# EAGLE board ModuleCarrier-NINA-B1-v1.0.0 (EAGLE 7.7.0)
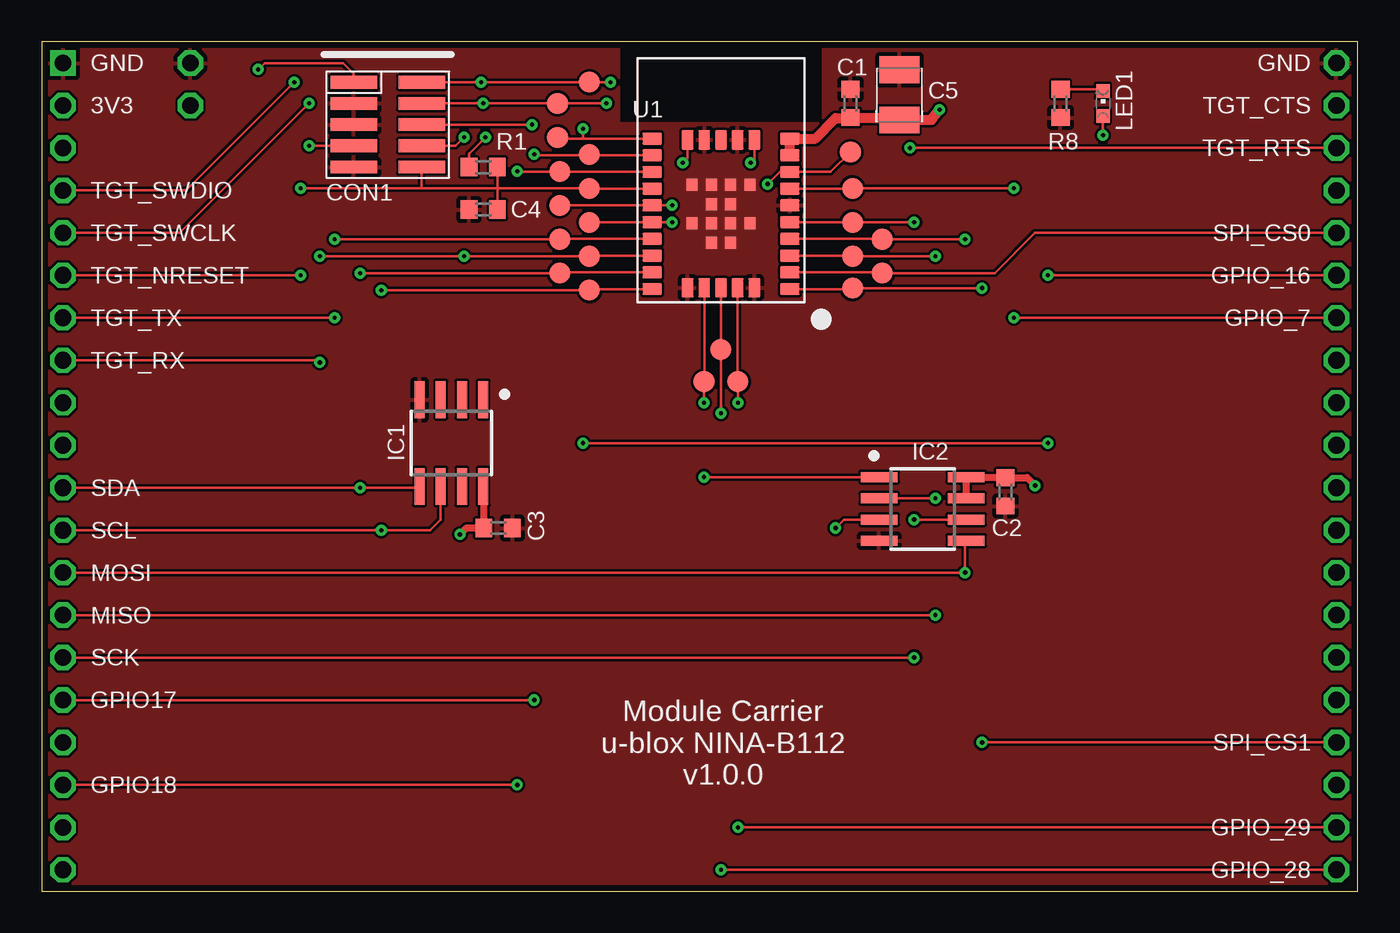
[diagram p0: board, top side]
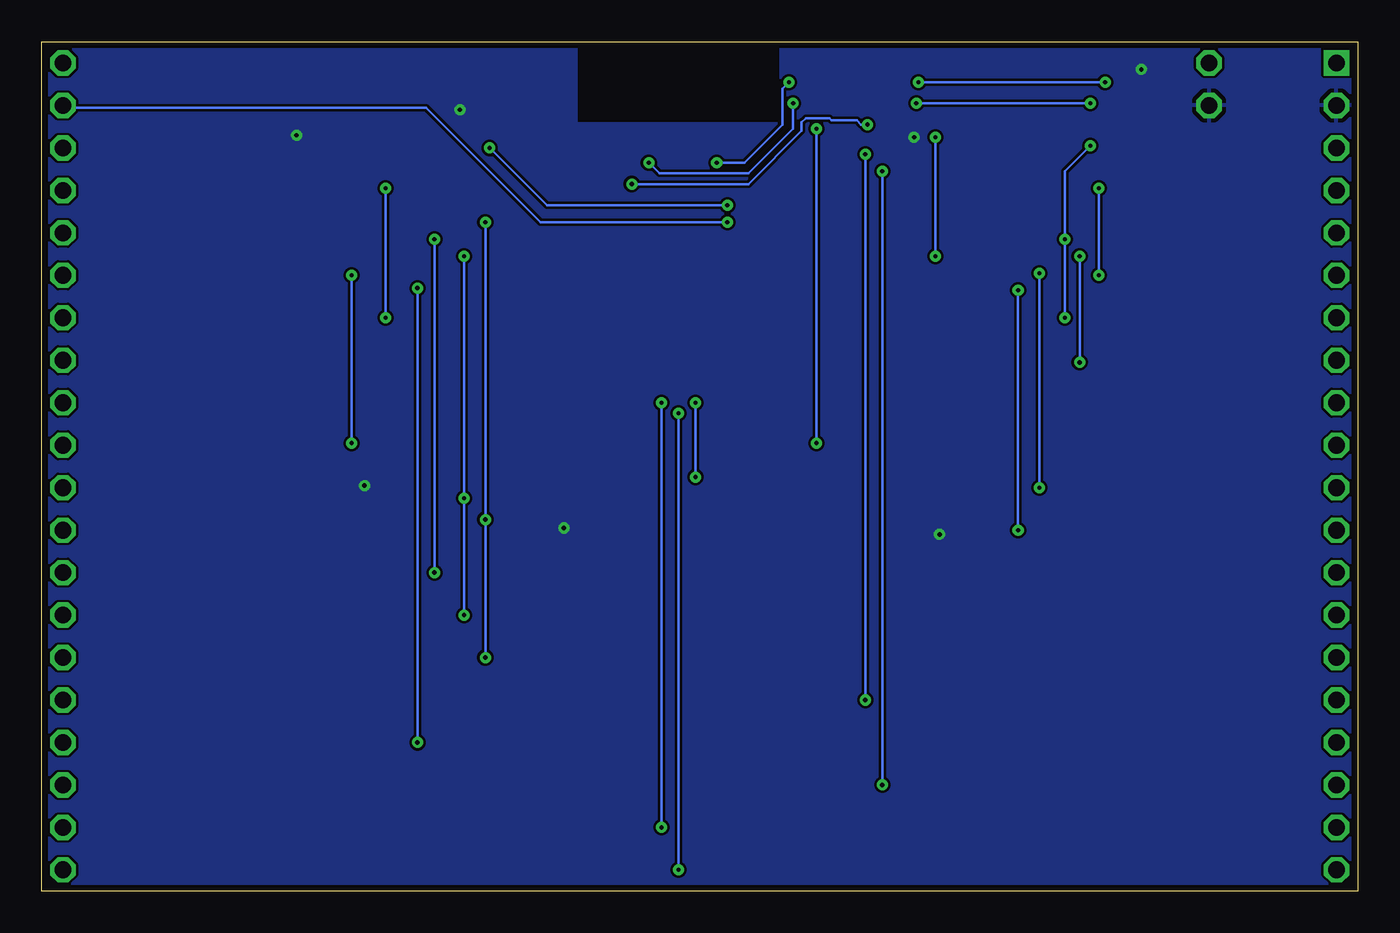
[diagram p1: board, bottom side, seen from below]

Size 78.74 x 50.8 mm. Coordinates in mm from the lower left corner, seen from the top.
Copper layers ((1*16)): Top 0.035mm / dielectric 0.8mm / Bottom 0.035mm
Design rules "mbed-HDK-6-6-2-layer": minimum track width 6mil, minimum drill 9mil, track to track 6mil, track to pad 6mil, pad to pad 6mil, via to via 6mil, smd to smd 6mil, copper to edge 15mil, drill to drill 8mil, minimum pad ring 10mil, minimum via ring 8mil, stop-mask expansion 4mil, vias tented up to drill 0mil, thermal gap 10mil

## Footprints (pad centres in the part's own frame; a part is rotated, then mirrored left to right if it is on the bottom)
0603 = smd 1 x 1.1: 1 -0.85,0; 2 0.85,0
SMC_B = smd 1.6 x 2.4: + -1.5,0; - 1.5,0
FTSH-105-02 = smd 0.762 x 2.794: 1 0.381,-2.032; 2 0.381,2.032; 3 1.651,-2.032; 4 1.651,2.032; 5 2.921,-2.032; 6 2.921,2.032; 7 4.191,-2.032; 8 4.191,2.032; 9 5.461,-2.032; 10 5.461,2.032
SO8 = smd 0.6 x 2.2: 1 -1.905,-2.6; 2 -0.635,-2.6; 3 0.635,-2.6; 4 1.905,-2.6; 5 1.905,2.6; 6 0.635,2.6; 7 -0.635,2.6; 8 -1.905,2.6
CHIPLED_0603 = smd 0.8 x 0.8: A 0,-0.75; C 0,0.75
MODULE_DAUGHTER = drill 1 square: 1 0,0 | drill 1 octagon: 2 0,-2.54; 3 0,-5.08; 4 0,-7.62; 5 0,-10.16; 6 0,-12.7; 7 0,-15.24; 8 0,-17.78; 9 0,-20.32; 10 0,-22.86; 11 0,-25.4; 12 0,-27.94; 13 0,-30.48; 14 0,-33.02; 15 0,-35.56; 16 0,-38.1; 17 0,-40.64; 18 0,-43.18; 19 0,-45.72; 20 0,-48.26; 21 76.2,-48.26; 22 76.2,-45.72; 23 76.2,-43.18; 24 76.2,-40.64; 25 76.2,-38.1; 26 76.2,-35.56; 27 76.2,-33.02; 28 76.2,-30.48; 29 76.2,-27.94; 30 76.2,-25.4; 31 76.2,-22.86; 32 76.2,-20.32; 33 76.2,-17.78; 34 76.2,-15.24; 35 76.2,-12.7; 36 76.2,-10.16; 37 76.2,-7.62; 38 76.2,-5.08; 39 76.2,-2.54; 40 76.2,0
TP50-PTH = drill 1 octagon: TP 0,0
B1,27 = smd 1.27 x 1.27: TP 0,0
NINA112-42 = smd 0.7 x 1.15: 1 -4.5,-4.125; 2 -3.5,-4.125; 3 -2.5,-4.125; 4 -1.5,-4.125; 5 -0.5,-4.125; 6 0.5,-4.125; 7 1.5,-4.125; 8 2.5,-4.125; 9 3.5,-4.125; 10 4.5,-4.125; 16 4.5,4.125; 17 3.5,4.125; 18 2.5,4.125; 19 1.5,4.125; 20 0.5,4.125; 21 -0.5,4.125; 22 -1.5,4.125; 23 -2.5,4.125; 24 -3.5,4.125; 25 -4.5,4.125 | smd 1.15 x 0.7: 11 4.425,-2; 12 4.425,-1; 13 4.425,0; 14 4.425,1; 15 4.425,2; 26 -4.425,2; 27 -4.425,1; 28 -4.425,0; 29 -4.425,-1; 30 -4.425,-2 | smd 0.7 x 0.7: 31 -1.725,-0.575; 32 -1.725,0.575; 33 -0.575,-1.725; 34 -0.575,-0.575; 35 -0.575,0.575; 36 -0.575,1.725; 37 0.575,-0.575; 38 0.575,0.575; 39 1.725,-1.725; 40 1.725,-0.575; 41 1.725,0.575; 42 1.725,1.725

## Placement (x,y rotation side)
C1  100nF  [0603]  48.39,47.12 90 top
C2  100nF  [0603]  57.66,23.88 270 top
C3  100nF  [0603]  27.3,21.72 0 top
C4  100nF  [0603]  26.42,40.77 180 top
C5  10uF  [SMC_B]  51.31,47.62 90 top
CON1  SWD-10/TC2050_SMD  [FTSH-105-02]  20.7,48.77 270 top
IC1  ATECC608A  [SO8]  24.51,26.8 180 top
IC2  MX25R3235FM1IH0  [SO8]  52.71,22.86 270 top
LED1  RED  [CHIPLED_0603]  63.5,47.12 0 top
MOD1  MODULE_DAUGHTER  [MODULE_DAUGHTER]  1.27,49.53 0 top
R1  10k  [0603]  26.42,43.31 180 top
R8  1k  [0603]  60.96,47.12 90 top
TP1  TEST-POINT-50R-PTH  [TP50-PTH]  8.89,46.99 0 top
TP2  TEST-POINT-50R-PTH  [TP50-PTH]  8.89,49.53 0 top
TP3  PTR1B1,27  [B1,27]  48.51,40.01 90 top
TP4  PTR1B1,27  [B1,27]  50.29,38.99 90 top
TP5  PTR1B1,27  [B1,27]  48.51,37.97 90 top
TP6  PTR1B1,27  [B1,27]  50.29,36.96 90 top
TP7  PTR1B1,27  [B1,27]  48.51,36.07 90 top
TP8  PTR1B1,27  [B1,27]  30.99,38.99 90 top
TP9  PTR1B1,27  [B1,27]  32.77,37.97 90 top
TP10  PTR1B1,27  [B1,27]  30.99,41.02 90 top
TP11  PTR1B1,27  [B1,27]  32.77,40.01 90 top
TP12  PTR1B1,27  [B1,27]  32.77,35.94 90 top
TP13  PTR1B1,27  [B1,27]  30.99,36.96 90 top
TP14  PTR1B1,27  [B1,27]  48.51,42.04 90 top
TP15  PTR1B1,27  [B1,27]  30.86,45.09 90 top
TP16  PTR1B1,27  [B1,27]  32.77,44.07 90 top
TP17  PTR1B1,27  [B1,27]  30.99,43.05 90 top
TP18  PTR1B1,27  [B1,27]  39.62,30.48 90 top
TP19  PTR1B1,27  [B1,27]  40.64,32.39 90 top
TP20  PTR1B1,27  [B1,27]  41.66,30.48 90 top
TP21  PTR1B1,27  [B1,27]  32.77,42.04 90 top
TP22  PTR1B1,27  [B1,27]  30.86,47.12 90 top
TP23  PTR1B1,27  [B1,27]  32.77,48.39 90 top
TP24  PTR1B1,27  [B1,27]  48.39,44.2 90 top
U1  NINA-B112112  [NINA112-42]  40.64,40.51 90 top

## Library data of the parts
C1-C4 R1 R8 = mbed-HDK-RLC
C5 = mbed-HDK-RLC; MF: Kemet; MFN: T491B106K020AT; OC-DIGIKEY: 399-8298-1-ND; OC-MOUSER: 80-T491B106K020; OC-NEWARK: 57K1740
CON1 = mbed-HDK-Connector
IC1 MOD1 TP3-TP24 U1 = blackbriar
IC2 = blackbriar; MF: Macronix; MFN: MX25R3235FM2IH0; OC-DIGIKEY: 1092-1174-ND
LED1 = mbed-HDK-Optical; MF: Wurth Electronics Inc; MFN: 150060RS75000; OC-DIGIKEY: 732-4978-1-ND; OC-MOUSER: 710-150060RS75000; OC-NEWARK: 2322071
TP1 TP2 = mbed-HDK

## Nets
+3.3V_TGT: C1.1 C2.1 C3.1 C5.+ CON1.1 IC1.8 IC2.3 IC2.7 IC2.8 LED1.A MOD1.2 R1.2 TP1.TP U1.9 U1.10
GND: C1.2 C2.2 C3.2 C4.2 C5.- CON1.3 CON1.5 CON1.9 IC1.4 IC2.4 MOD1.1 MOD1.40 R8.1 TP2.TP U1.6 U1.12 U1.14 U1.26 U1.30 U1.31 U1.32 U1.33 U1.34 U1.35 U1.36 U1.37 U1.38 U1.39 U1.40 U1.41 U1.42
GPIO_7: MOD1.34 TP14.TP U1.7
GPIO_16: MOD1.35 TP15.TP U1.16
GPIO_17: MOD1.16 TP16.TP U1.17
GPIO_18: MOD1.18 TP17.TP U1.18
GPIO_27: IC2.1 TP18.TP U1.27
GPIO_28: MOD1.21 TP19.TP U1.28
GPIO_29: MOD1.22 TP20.TP U1.29
MISO: IC2.2 MOD1.14 TP5.TP U1.3
MOSI: IC2.5 MOD1.13 TP4.TP U1.4
PA_1: LED1.C R8.2
SCK: IC2.6 MOD1.15 TP3.TP U1.5
SCL: IC1.6 MOD1.12 TP12.TP U1.25
SDA: IC1.5 MOD1.11 TP13.TP U1.24
SPI_!CS0: MOD1.36 TP6.TP U1.2
SPI_!CS1: MOD1.24 TP7.TP U1.1
TGT_CTS: MOD1.39 TP11.TP U1.21
TGT_NRESET: C4.1 CON1.10 MOD1.6 R1.1 TP21.TP U1.19
TGT_RTS: MOD1.38 TP10.TP U1.20
TGT_RX: CON1.8 MOD1.8 TP9.TP U1.23
TGT_SWCLK: CON1.4 MOD1.5 TP22.TP U1.11
TGT_SWDIO: CON1.2 MOD1.4 TP23.TP U1.15
TGT_SWO: CON1.6 TP24.TP U1.8
TGT_TX: CON1.7 MOD1.7 TP8.TP U1.22

## Tracks (layer width: path | path; a pad name or v marks a point on that pad's centre or on a via)
+3.3V_TGT  (via drill 0.25)
  Top 0.152: LED1.A v63.5,45.21 | CON1.1 18.67,48.9 18.03,49.53 13.33,49.53 v12.95,49.15 | IC2.3 48.01,22.23 v47.5,21.72 | R1.2 25.57,44.11 v26.54,45.09
  Top 0.406: v25.02,21.34 25.4,21.72 C3.1 26.45,24.16 IC1.8 | v59.44,24.26 58.97,24.73 C2.1 57.62,24.77 IC2.8 IC2.7
  Top 0.61: U1.9 U1.10 46.28,45.01 47.5,46.23 48.35,46.23 C1.1 51.29,46.27 C5.+ 53.24,46.12 v53.72,46.74
  pour Bottom: 0,0 78.74,0 78.74,50.8 0,50.8
GND
  pour Top: 0,0 78.74,0 78.74,50.8 0,50.8
GPIO_7  (via drill 0.25)
  Top 0.152: U1.7 48.49,42.01 TP14.TP v58.17,42.04 | v58.17,34.29 MOD1.34
  Bottom 0.152: v58.17,42.04 v58.17,34.29
GPIO_16  (via drill 0.25)
  Top 0.152: U1.16 32.38,45.01 | 32.38,45.01 30.93,45.01 TP15.TP | v32.38,26.8 v60.2,26.8 | v60.2,36.83 MOD1.35 | v32.38,45.59 32.38,45.01
  Bottom 0.152: v32.38,45.59 v32.38,26.8 | v60.2,26.8 v60.2,36.83
GPIO_17  (via drill 0.25)
  Top 0.152: U1.17 32.82,44.01 | 32.82,44.01 TP16.TP | 32.82,44.01 29.52,44.01 v29.46,44.07 | v29.46,11.43 MOD1.16
  Bottom 0.152: v29.46,44.07 v29.46,11.43
GPIO_18  (via drill 0.25)
  Top 0.152: U1.18 31.03,43.01 | 31.03,43.01 TP17.TP | 31.03,43.01 28.49,43.01 v28.45,43.05 | v28.45,6.35 MOD1.18
  Bottom 0.152: v28.45,43.05 v28.45,6.35
GPIO_27  (via drill 0.25)
  Top 0.152: U1.27 39.64,30.5 TP18.TP v39.62,29.21 | IC2.1 v39.62,24.77
  Bottom 0.152: v39.62,24.77 v39.62,29.21
GPIO_28  (via drill 0.25)
  Top 0.152: U1.28 TP19.TP v40.64,28.58 | v40.64,1.27 MOD1.21
  Bottom 0.152: v40.64,28.58 v40.64,1.27
GPIO_29  (via drill 0.25)
  Top 0.152: U1.29 41.64,30.5 TP20.TP v41.66,29.21 | v41.66,3.81 MOD1.22
  Bottom 0.152: v41.66,29.21 v41.66,3.81
MISO  (via drill 0.25)
  Top 0.152: U1.3 48.47,38.01 TP5.TP v53.47,37.97 | v53.47,16.51 MOD1.14 | IC2.2 v53.47,23.5
  Bottom 0.152: v53.47,37.97 v53.47,23.5 v53.47,16.51
MOSI  (via drill 0.25)
  Top 0.152: U1.4 50.27,39.01 TP4.TP v55.25,38.99 | MOD1.13 v55.25,19.05 55.25,20.89 IC2.5
  Bottom 0.152: v55.25,19.05 v55.25,38.99
PA_1
  Top 0.152: R8.2 63.5,47.97 LED1.C
SCK  (via drill 0.25)
  Top 0.152: U1.5 48.51,40.01 TP3.TP v52.2,40.01 | v52.2,13.97 MOD1.15 | IC2.6 v52.2,22.23
  Bottom 0.152: v52.2,40.01 v52.2,22.23 v52.2,13.97
SCL  (via drill 0.25)
  Top 0.152: U1.25 32.84,36.01 TP12.TP v20.32,35.94 | MOD1.12 v20.32,21.59 23.24,21.59 23.88,22.23 IC1.6
  Bottom 0.152: v20.32,21.59 v20.32,35.94
SDA  (via drill 0.25)
  Top 0.152: U1.24 31.04,37.01 TP13.TP v19.05,36.96 | MOD1.11 v19.05,24.13 22.54,24.13 IC1.5
  Bottom 0.152: v19.05,24.13 v19.05,36.96
SPI_!CS0
  Top 0.152: U1.2 50.24,37.01 TP6.TP 57.02,36.96 59.44,39.37 MOD1.36
SPI_!CS1  (via drill 0.25)
  Top 0.152: U1.1 48.46,36.01 TP7.TP v56.26,36.07 | v56.26,8.89 MOD1.24
  Bottom 0.152: v56.26,36.07 v56.26,8.89
TGT_CTS  (via drill 0.25)
  Top 0.152: TP11.TP 32.77,40.01 U1.21 37.71,40.01 v37.72,40.01
  Bottom 0.152: v37.72,40.01 48.9,40.01 55.75,46.86 77.34,46.86 MOD1.39
TGT_NRESET  (via drill 0.25)
  Top 0.152: U1.19 32.79,42.01 TP21.TP 27.3,42.04 | MOD1.6 v15.49,36.83 | v15.49,42.04 22.73,42.04 | 22.73,42.04 27.3,42.04 | CON1.10 22.73,42.04 | R1.1 27.27,42.08 27.3,42.04 | C4.1 27.27,42 27.3,42.04
  Bottom 0.152: v15.49,36.83 v15.49,42.04
TGT_RTS  (via drill 0.25)
  Top 0.152: TP10.TP U1.20 v37.71,41.01 v37.72,41.02 | v51.94,44.45 MOD1.38
  Bottom 0.152: v37.72,41.02 48.51,41.02 v51.94,44.45
TGT_RX  (via drill 0.25)
  Top 0.152: U1.23 32.81,38.01 TP9.TP v25.27,37.97 v16.64,37.97 | MOD1.8 16.51,31.75 v16.64,31.62 | CON1.8 24.77,44.58 v25.27,45.09
  Bottom 0.152: v16.64,31.62 v16.64,37.97 | v25.27,45.09 v25.27,37.97
TGT_SWCLK  (via drill 0.25)
  Top 0.152: CON1.4 v26.42,47.12 TP22.TP v33.78,47.12 | MOD1.5 8.26,39.37 v16,47.12 | U1.11 42.64,43.78 v42.42,43.56
  Bottom 0.152: v16,47.12 v26.42,47.12 | v42.42,43.56 41.78,42.93 36.45,42.93 33.78,45.59 v33.78,47.12
TGT_SWDIO  (via drill 0.25)
  Top 0.152: CON1.2 v26.29,48.39 TP23.TP v34.04,48.39 | MOD1.4 8.64,41.91 v15.11,48.39 | U1.15 38.64,43.85 v38.35,43.56
  Bottom 0.152: v15.11,48.39 v26.29,48.39 | v38.35,43.56 36.7,43.56 34.42,45.85 34.42,48.01 v34.04,48.39
TGT_SWO  (via drill 0.25)
  Top 0.152: TP24.TP 47.2,43.01 U1.8 44.16,43.01 v43.43,42.29 | v29.34,45.85 CON1.6
  Bottom 0.152: v43.43,42.29 36.45,42.29 33.27,45.47 33.27,45.97 33.02,46.23 31.62,46.23 31.5,46.1 29.97,46.1 29.72,45.85 v29.34,45.85
TGT_TX  (via drill 0.25)
  Top 0.152: U1.22 31.01,39.01 TP8.TP v17.53,38.99 | MOD1.7 v17.53,34.29 | v16,44.58 CON1.7
  Bottom 0.152: v17.53,34.29 v17.53,38.99 17.53,43.05 v16,44.58

## Text on the board
tPlace: GND / 3V3 / / TGT_SWDIO / TGT_SWCLK / TGT_NRESET / TGT_TX / TGT_RX / / / SDA / SCL / MOSI / MISO / SCK / GPIO17 / / GPIO18 | GND / TGT_CTS / TGT_RTS / / SPI_CS0 / GPIO_16 / GPIO_7 / / / / / / / / / / SPI_CS1 / / GPIO_29 / GPIO_28 | Module Carrier / u-blox NINA-B112 / v1.0.0